# Altium PCB 4GModule-EC2X-PCB.PcbDoc
Units mil, origin at the board's own origin, x right, y up, seen from the top; angles counter-clockwise.
Board outline not stored, 2 copper layers (Top Layer, Bottom Layer); 31 components, 0 nets, 209 pads, 0 vias.
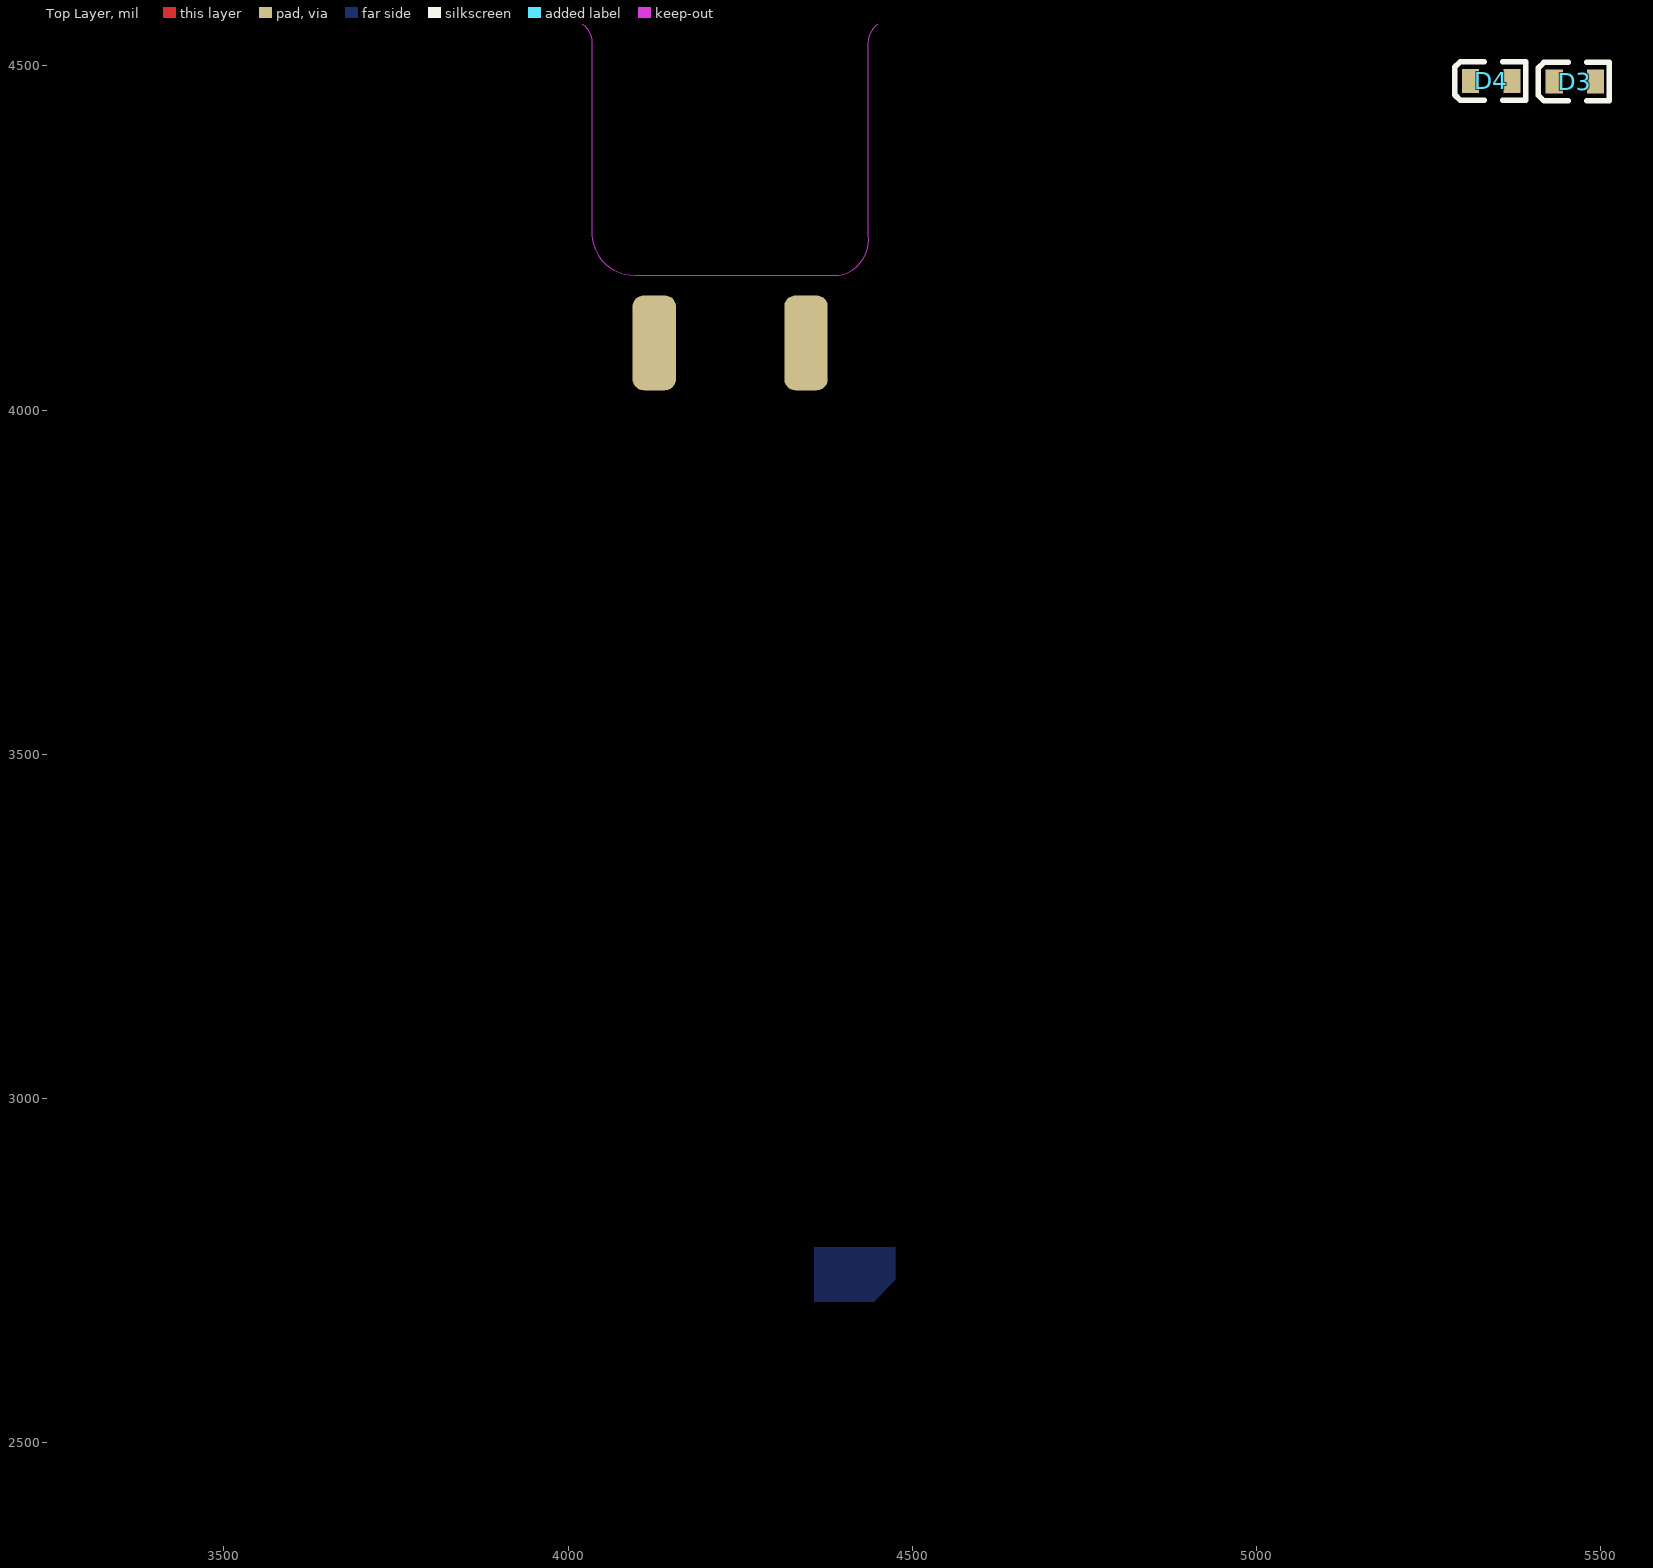
[diagram p0: Top Layer view]
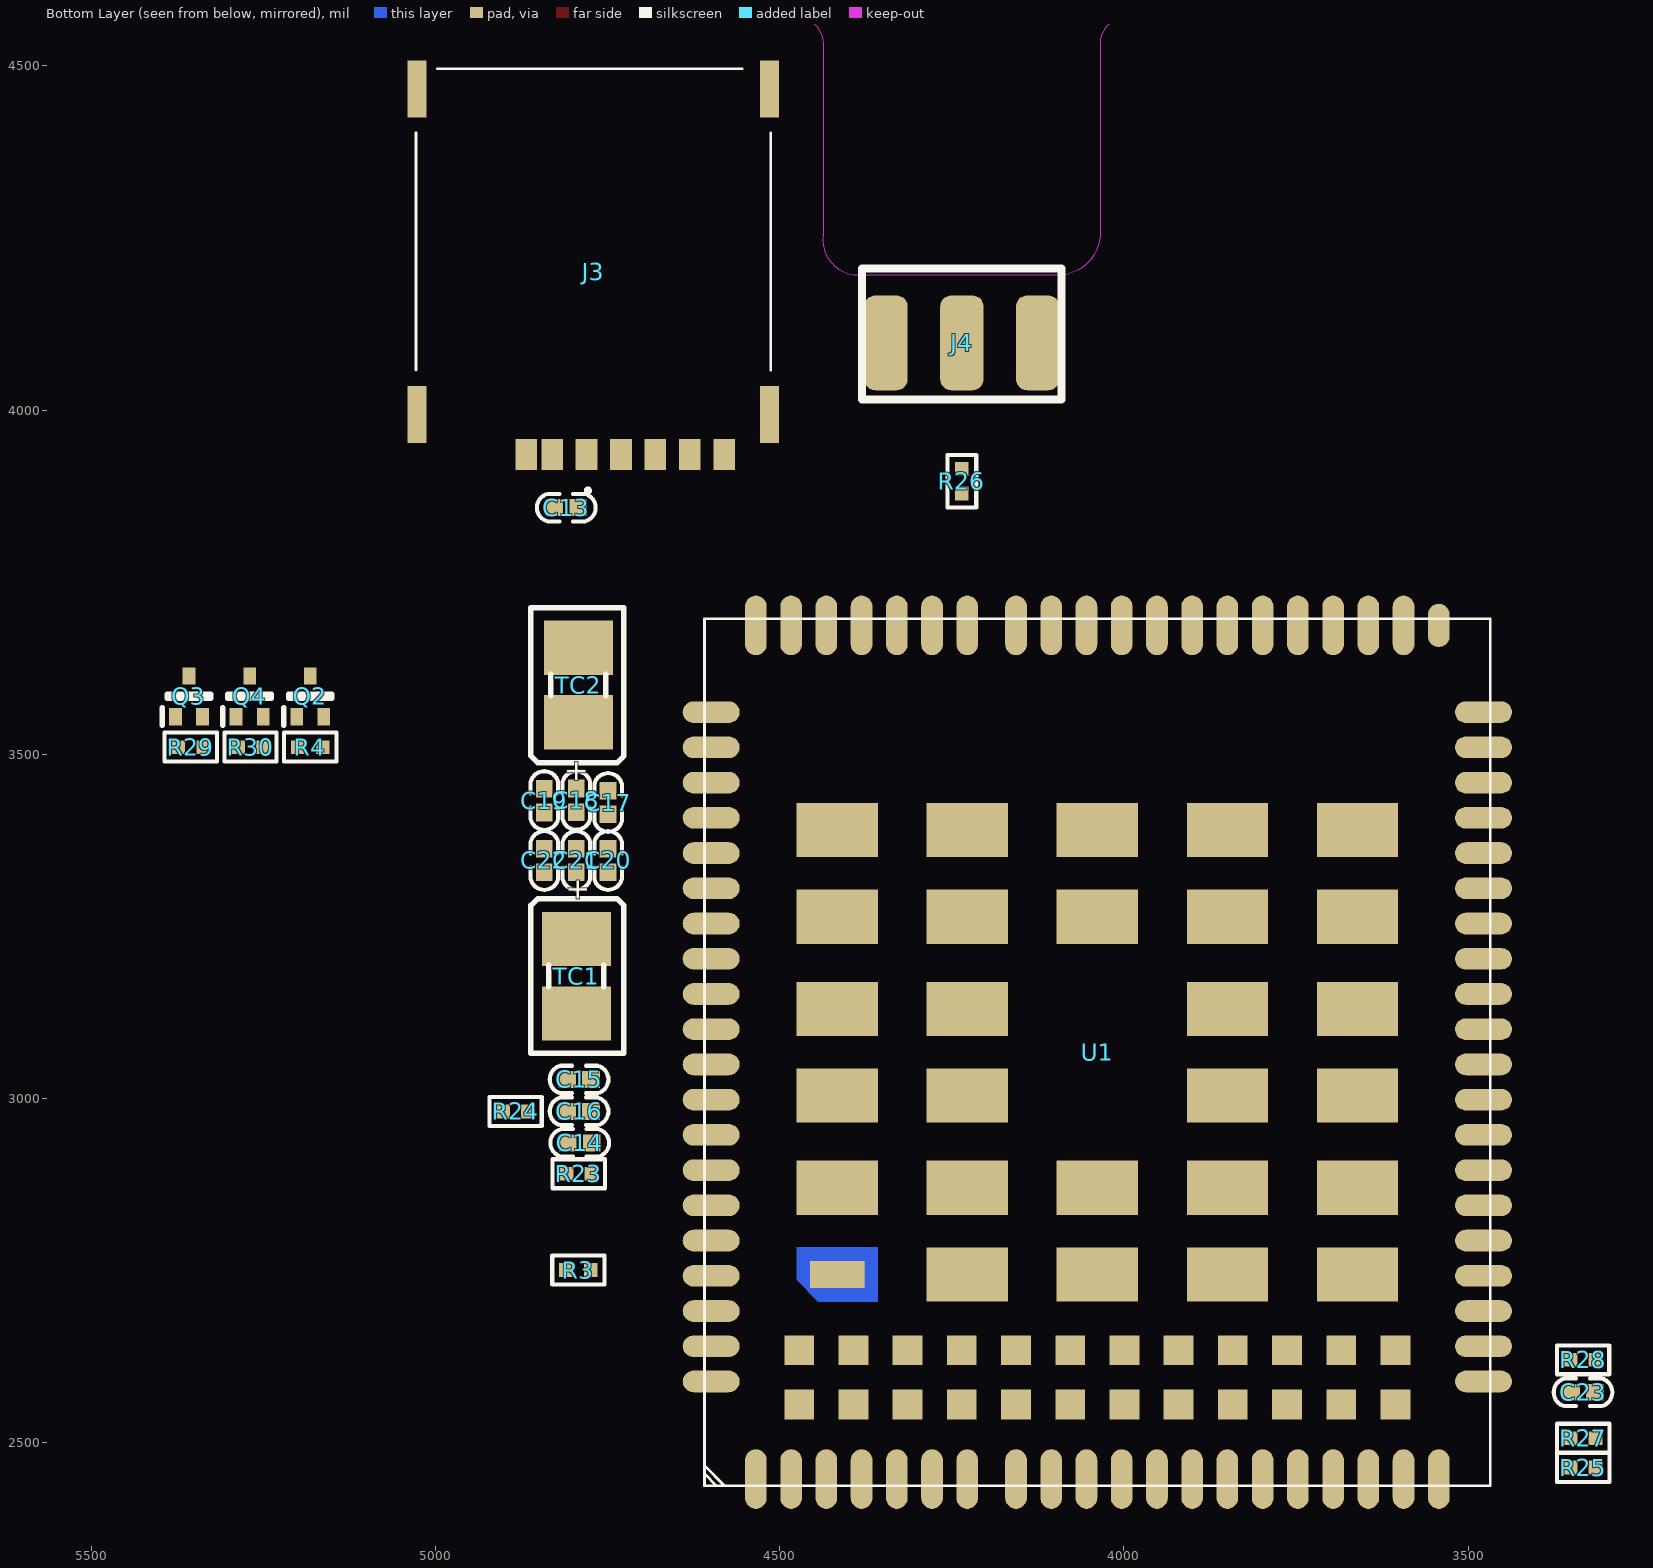
[diagram p1: Bottom Layer view, seen from below]

## Layer stack, top to bottom
Top Solder: solder mask 0.4, Solder Resist, Dk 3.5
Top Layer: signal copper 1.4
Dielectric 1: dielectric 12.6, FR-4, Dk 4.8
Bottom Layer: signal copper 1.4
Bottom Solder: solder mask 0.4, Solder Resist, Dk 3.5

## Components (designator, comment, footprint, x,y, rotation, side; value= is the part's Value field where it differs from the comment)
C13 "100nF" 0402C 4810.08,3858.32 r180 bottom
C14 "33pF" 0402C 4790.57,2935.42 r0 bottom
C15 "33pF" 0402C 4791.56,3027.48 r0 bottom
C16 "33pF" 0402C 4791.56,2981.12 r0 bottom
C17 "100nF" 0402C 4749.31,3429.89 r90 bottom
C18 "33pF" 0402C 4795.52,3432.86 r90 bottom
C19 "10pF" 0402C 4841.99,3432.75 r90 bottom
C20 "100nF" 0402C 4749.31,3345.67 r270 bottom
C21 "33pF" 0402C 4795.51,3345.67 r270 bottom
C22 "10pF" 0402C 4841.98,3345.67 r270 bottom
C23 "10nF" 0402C 3332.93,2573 r0 bottom
D3 "LED" LED-0603W 5492.73,4477.39 r180 top
D4 "LED" LED-0603B 5371.13,4478.18 r180 top
J3 "SMN-303" SMN303 4770.87,4215.75 r0 bottom
J4 "RF_ANT_60" SMA-EDGE 4235.43,4097.64 r90 bottom
Q2 "DTC043ZEBTL" SOTFL50P160X85-3N 5182.03,3584.21 r90 bottom
Q3 "DTC043ZEBTL" SOTFL50P160X85-3N 5358.27,3584.21 r90 bottom
Q4 "DTC043ZEBTL" SOTFL50P160X85-3N 5270.15,3584.21 r90 bottom
R3 "0R" 0402R 4792.5,2750.6 r0 bottom
R4 "10k" 0402R 5182.03,3510.35 r0 bottom
R23 "10k" 0402R 4791.9,2890.56 r0 bottom
R24 "15k" 0402R 4883.76,2981.12 r0 bottom
R25 "51k" 0402R 3332.73,2463.68 r180 bottom
R26 "0R" 0402R 4235.43,3896.74 r90 bottom
R27 "4.7k/NF" 0402R 3332.73,2506.25 r180 bottom
R28 "20k" 0402R 3332.93,2620.24 r0 bottom
R29 "10K" 0402R 5355.69,3510.35 r180 bottom
R30 "10K" 0402R 5268.86,3510.35 r180 bottom
TC1 "100uF/6.3V" TAJ-B/3528 4791.5,3180.35 r270 bottom
TC2 "100uF/6.3V" TAJ-B/3528 4796.5,3597.61 r90 bottom
U1 "EC20 R2.1" EC20_R2.1 4038.58,3067.09 r90 bottom

## Footprints (in the part's own frame and the unit in brackets; to place one, negate y for a bottom-side part, rotate by r counter-clockwise, add the part's x,y. Pads: shape width x height; smd on the part's side, far side on the other; paste and mask are expansions set on the pad)
0402C [mm]
  rect 0.65x0.62 smd: 1(-0.44,0) 2(0.44,0)
  silkscreen extent -1.08,-0.51 1.08,0.51, body extent -0.51,-0.25 0.49,0.25, height 0.55
0402R [mil]
  rect 20x20 smd: 1(-18,0) 2(18,0)
  silkscreen extent -38,-21 38,21, body extent -20,-11 20,11, height 16
EC20_R2.1 [mm]
  oval 2.2x0.8 smd mask+0.05: 1(-15.75,12.6) 2(-15.75,11.3) 3(-15.75,10) 4(-15.75,8.7) 5(-15.75,7.4) 6(-15.75,6.1) 7(-15.75,4.8) 8(-15.75,0.4) 9(-15.75,-0.9) 10(-15.75,-2.2) 11(-15.75,-3.5) 12(-15.75,-4.8) 13(-15.75,-6.1) 14(-15.75,-7.4) 15(-15.75,-8.7) 16(-15.75,-10) 17(-15.75,-11.3) 18(-15.75,-12.6) 38(15.75,-11.3) 39(15.75,-10) 40(15.75,-8.7) 41(15.75,-7.4) 42(15.75,-6.1) 43(15.75,-4.8) 44(15.75,-3.5) 45(15.75,-2.2) 46(15.75,-0.9) 47(15.75,0.4) 48(15.75,4.8) 49(15.75,6.1) 50(15.75,7.4) 51(15.75,8.7) 52(15.75,10) 53(15.75,11.3) 54(15.75,12.6) 141(-15.75,3) 142(-15.75,1.7) 143(15.75,1.7) 144(15.75,3)
  oval 0.8x2.1 smd mask+0.05: 19(-9.55,-14.25) 20(-8.25,-14.25) 21(-6.95,-14.25) 22(-5.65,-14.25) 23(-4.35,-14.25) 24(-3.05,-14.25) 25(-1.75,-14.25) 26(-0.45,-14.25) 27(0.85,-14.25) 28(2.15,-14.25) 29(3.45,-14.25) 30(4.75,-14.25) 31(6.05,-14.25) 32(7.35,-14.25) 33(8.65,-14.25) 34(9.95,-14.25) 35(11.25,-14.25) 36(12.55,-14.25) 55(12.55,14.25) 56(11.25,14.25) 57(9.95,14.25) 58(8.65,14.25) 59(7.35,14.25) 60(6.05,14.25) 61(4.75,14.25) 62(3.45,14.25) 63(2.15,14.25) 64(0.85,14.25) 65(-0.45,14.25) 66(-1.75,14.25) 67(-3.05,14.25) 68(-4.35,14.25) 69(-5.65,14.25) 70(-6.95,14.25) 71(-8.25,14.25) 72(-9.55,14.25) 113(-10.85,14.25) 114(-12.15,14.25) 115(-10.85,-14.25) 116(-12.15,-14.25)
  oval 1.6x0.8 smd mask+0.05: 37(15.75,-12.6)
  rect 2x3 smd mask+0.05: 85(8.2,9.6) 86(8.2,4.8) 87(8.2,0) 88(8.2,-4.8) 89(8.2,-9.6) 90(5,9.6) 91(5,4.8) 92(5,0) 93(5,-4.8) 94(5,-9.6) 95(1.6,9.6) 96(1.6,4.8) 97(1.6,-4.8) 98(1.6,-9.6) 99(-1.6,9.6) 100(-1.6,4.8) 101(-1.6,-4.8) 102(-1.6,-9.6) 103(-5,9.6) 104(-5,4.8) 105(-5,0) 106(-5,-4.8) 107(-5,-9.6) 109(-8.2,4.8) 110(-8.2,0) 111(-8.2,-4.8) 112(-8.2,-9.6)
  rect 1x2 smd: 108(-8.2,9.6)
  rect 1.1x1.1 smd mask+0.05: 117(-11,11) 118(-11,9) 119(-11,7) 120(-11,5) 121(-11,3) 122(-11,1) 123(-11,-1) 124(-11,-3) 125(-11,-5) 126(-11,-7) 127(-11,-9) 128(-11,-11) 129(-13,11) 130(-13,9) 131(-13,7) 132(-13,5) 133(-13,3) 134(-13,1) 135(-13,-1) 136(-13,-3) 137(-13,-5) 138(-13,-7) 139(-13,-9) 140(-13,-11)
  Top Layer region: -9.2,10.3 -8.4,11.1 -7.2,11.1 -7.2,8.1 -9.2,8.1 -9.2,10.3
  Top Layer pour cut-out: 3.5,2.8 -3.5,2.8 -3.5,-2.8 3.5,-2.8 3.5,2.8
  silkscreen extent -16,-14.5 16,14.5, body extent -16,-14.5 16,14.5, height 2.4
LED-0603B [mil]
  rect 25x35 smd: A(0,0) K(60,0)
  silkscreen extent -20,-28 83,28, body extent -1,-17 61,15, height 24
LED-0603W [mil]
  rect 25x35 smd: A(0,0) K(60,0)
  silkscreen extent -20,-28 83,28, body extent 4,-15 66,17, height 24
SMA-EDGE [mm]
  rrect50% 3.5x1.6 smd: 1(0,2.8) 2(0,-2.8) 5(0,0)
  rrect50% 3.5x1.6 smd far side: 3(0,-2.8) 4(0,2.8)
  Keep-Out Layer board cut-out: 2.5,-3.5 2.5,4 2.675,4.482 3.022,4.861 3.487,5.078 4,5.1 4,5.1 11.059,5.1 11.403,5.169 11.695,5.364 11.89,5.656 11.959,6 11.959,6 11.959,-6 11.89,-5.656 11.695,-5.364 11.403,-5.168 11.059,-5.1 11.059,-5.1 4,-5.1 3.411,-4.963 2.919,-4.611 2.599,-4.097 2.5,-3.5
  silkscreen extent -2.09,-3.68 2.74,3.68, body extent -1.64,-3 11.96,3, height 3.5
SMN303 [mm] "Nano SIM 自弹"
  rect 0.8x1.14 smd: C1(0.25,7.115) C2(-2.29,7.115) C3(-4.83,7.115) C5(1.52,7.115) C6(-1.02,7.115) C7(-3.56,7.115) CD1(2.47,7.115)
  round 0.375 hole 0.75 unplated: MH1(3.5,-5.115) MH2(-5,-5.115)
  rect 0.7x2.1 smd: MP1(-6.5,-6.365) MP2(-6.5,5.635) MP3(6.5,5.635) MP4(6.5,-6.365)
  silkscreen extent -6.55,-7.11 6.55,8.5, body extent -7.74,-7.45 7.75,8.55, height 1.15
SOTFL50P160X85-3N [mm]
  rect 0.64x0.47 smd: 1(-0.75,0.5) 2(-0.75,-0.5) 3(0.75,0)
  silkscreen extent -1.07,-0.8 0.08,0.98, body extent -0.8,-0.8 0.8,0.8, height 0.85
TAJ-B/3528 [mil]
  rect 78.74x100 smd: 1(-51.15,-4) 2(57,-4)
  silkscreen extent -110,-70 115,65, body extent -64,-60 74,50, height 75

## Part data
C13 C14 C15 C16: library part CAP, "无极性电容"
C17 C18 C19 C20 C21 C22 C23: library part CAP-NP
D3: "白色"
D4: "蓝色"
J3: "自弹式NANO SIM卡座 XUNPU(讯普)", Manufacturer_Name=XUNPU, Datasheet Link=https://datasheet.lcsc.com/szlcsc/XUNPU-SMN-303_C266888.pdf, Height=1.47mm, Manufacturer_Part_Number=SMN-303
Q2 Q3 Q4: "Transistor BJT NPN", Manufacturer_Name="ROHM Semiconductor", Mouser Part Number=755-DTC043ZEBTL, Arrow Part Number=DTC043ZEBTL, Datasheet Link=http://rohmfs.rohm.com/en/products/databook/datasheet/discrete/transistor/digital/dtc043zmt2l-e.pdf, Height=0.85mm, Manufacturer_Part_Number=DTC043ZEBTL, Mouser Price/Stock=https://www.mouser.co.uk/ProductDetail/ROHM-Semiconductor/DTC043ZEBTL?qs=n7vHx8wJlDGyWrBOh0icRQ%3D%3D
R3 R4 R23 R24 R25 R26 R27 R28 R29 R30: library part RES
TC1 TC2: library part TCAP

## Nets (pads, with @x,y where several pads share a name; then routed paths per layer and width w, separated by ;. In a path a pad name is that pad's centre, name@x,y a point inside that pad or via, vN(x,y) a via of type N, cw(c..) or ccw(c..) an arc to the next point about the centre after c; other vN are vias at no path point)
pads on no net: C13.1 C13.2 C14.1 C14.2 C15.1 C15.2 C16.1 C16.2 C17.1 C17.2 C18.1 C18.2 C19.1 C19.2 C20.1 C20.2 C21.1 C21.2 C22.1 C22.2 C23.1 C23.2 D3.A D3.K D4.A D4.K J3.C1 J3.C2 J3.C3 J3.C5 J3.C6 J3.C7 J3.CD1 J3.MH1 J3.MH2 J3.MP1 J3.MP2 J3.MP3 J3.MP4 J4.1 J4.2 J4.3 J4.4 J4.5 Q2.1 Q2.2 Q2.3 Q3.1 Q3.2 Q3.3 Q4.1 Q4.2 Q4.3 R3.1 R3.2 R4.1 R4.2 R23.1 R23.2 R24.1 R24.2 R25.1 R25.2 R26.1 R26.2 R27.1 R27.2 R28.1 R28.2 R29.1 R29.2 R30.1 R30.2 TC1.1 TC1.2 TC2.1 TC2.2 U1.1 U1.2 U1.3 U1.4 U1.5 U1.6 U1.7 U1.8 U1.9 U1.10 U1.11 U1.12 U1.13 U1.14 U1.15 U1.16 U1.17 U1.18 U1.19 U1.20 U1.21 U1.22 U1.23 U1.24 U1.25 U1.26 U1.27 U1.28 U1.29 U1.30 U1.31 U1.32 U1.33 U1.34 U1.35 U1.36 U1.37 U1.38 U1.39 U1.40 U1.41 U1.42 U1.43 U1.44 U1.45 U1.46 U1.47 U1.48 U1.49 U1.50 U1.51 U1.52 U1.53 U1.54 U1.55 U1.56 U1.57 U1.58 U1.59 U1.60 U1.61 U1.62 U1.63 U1.64 U1.65 U1.66 U1.67 U1.68 U1.69 U1.70 U1.71 U1.72 U1.85 U1.86 U1.87 U1.88 U1.89 U1.90 U1.91 U1.92 U1.93 U1.94 U1.95 U1.96 U1.97 U1.98 U1.99 U1.100 U1.101 U1.102 U1.103 U1.104 U1.105 U1.106 U1.107 U1.108 U1.109 U1.110 U1.111 U1.112 U1.113 U1.114 U1.115 U1.116 U1.117 U1.118 U1.119 U1.120 U1.121 U1.122 U1.123 U1.124 U1.125 U1.126 U1.127 U1.128 U1.129 U1.130 U1.131 U1.132 U1.133 U1.134 U1.135 U1.136 U1.137 U1.138 U1.139 U1.140 U1.141 U1.142 U1.143 U1.144

## Text inside footprints (layer, text, board x,y; h text height)
TC1: Bottom Overlay "+" at 4806.5,3320.35 h30 r90
TC2: Bottom Overlay "+" at 4781.5,3457.61 h30 r270